# Altium PCB OpenPack_BATMOD_V2p0.PcbDoc (part 2 of 2)
Units mm, origin at the board's own origin, x right, y up, seen from the top; angles counter-clockwise.
Board outline 140 x 94 mm, 4 copper layers (Top Layer, Mid Layer 1, Mid Layer 2, Bottom Layer), stack 1.57 mm thick; 239 components, 147 nets, 762 pads, 455 vias.
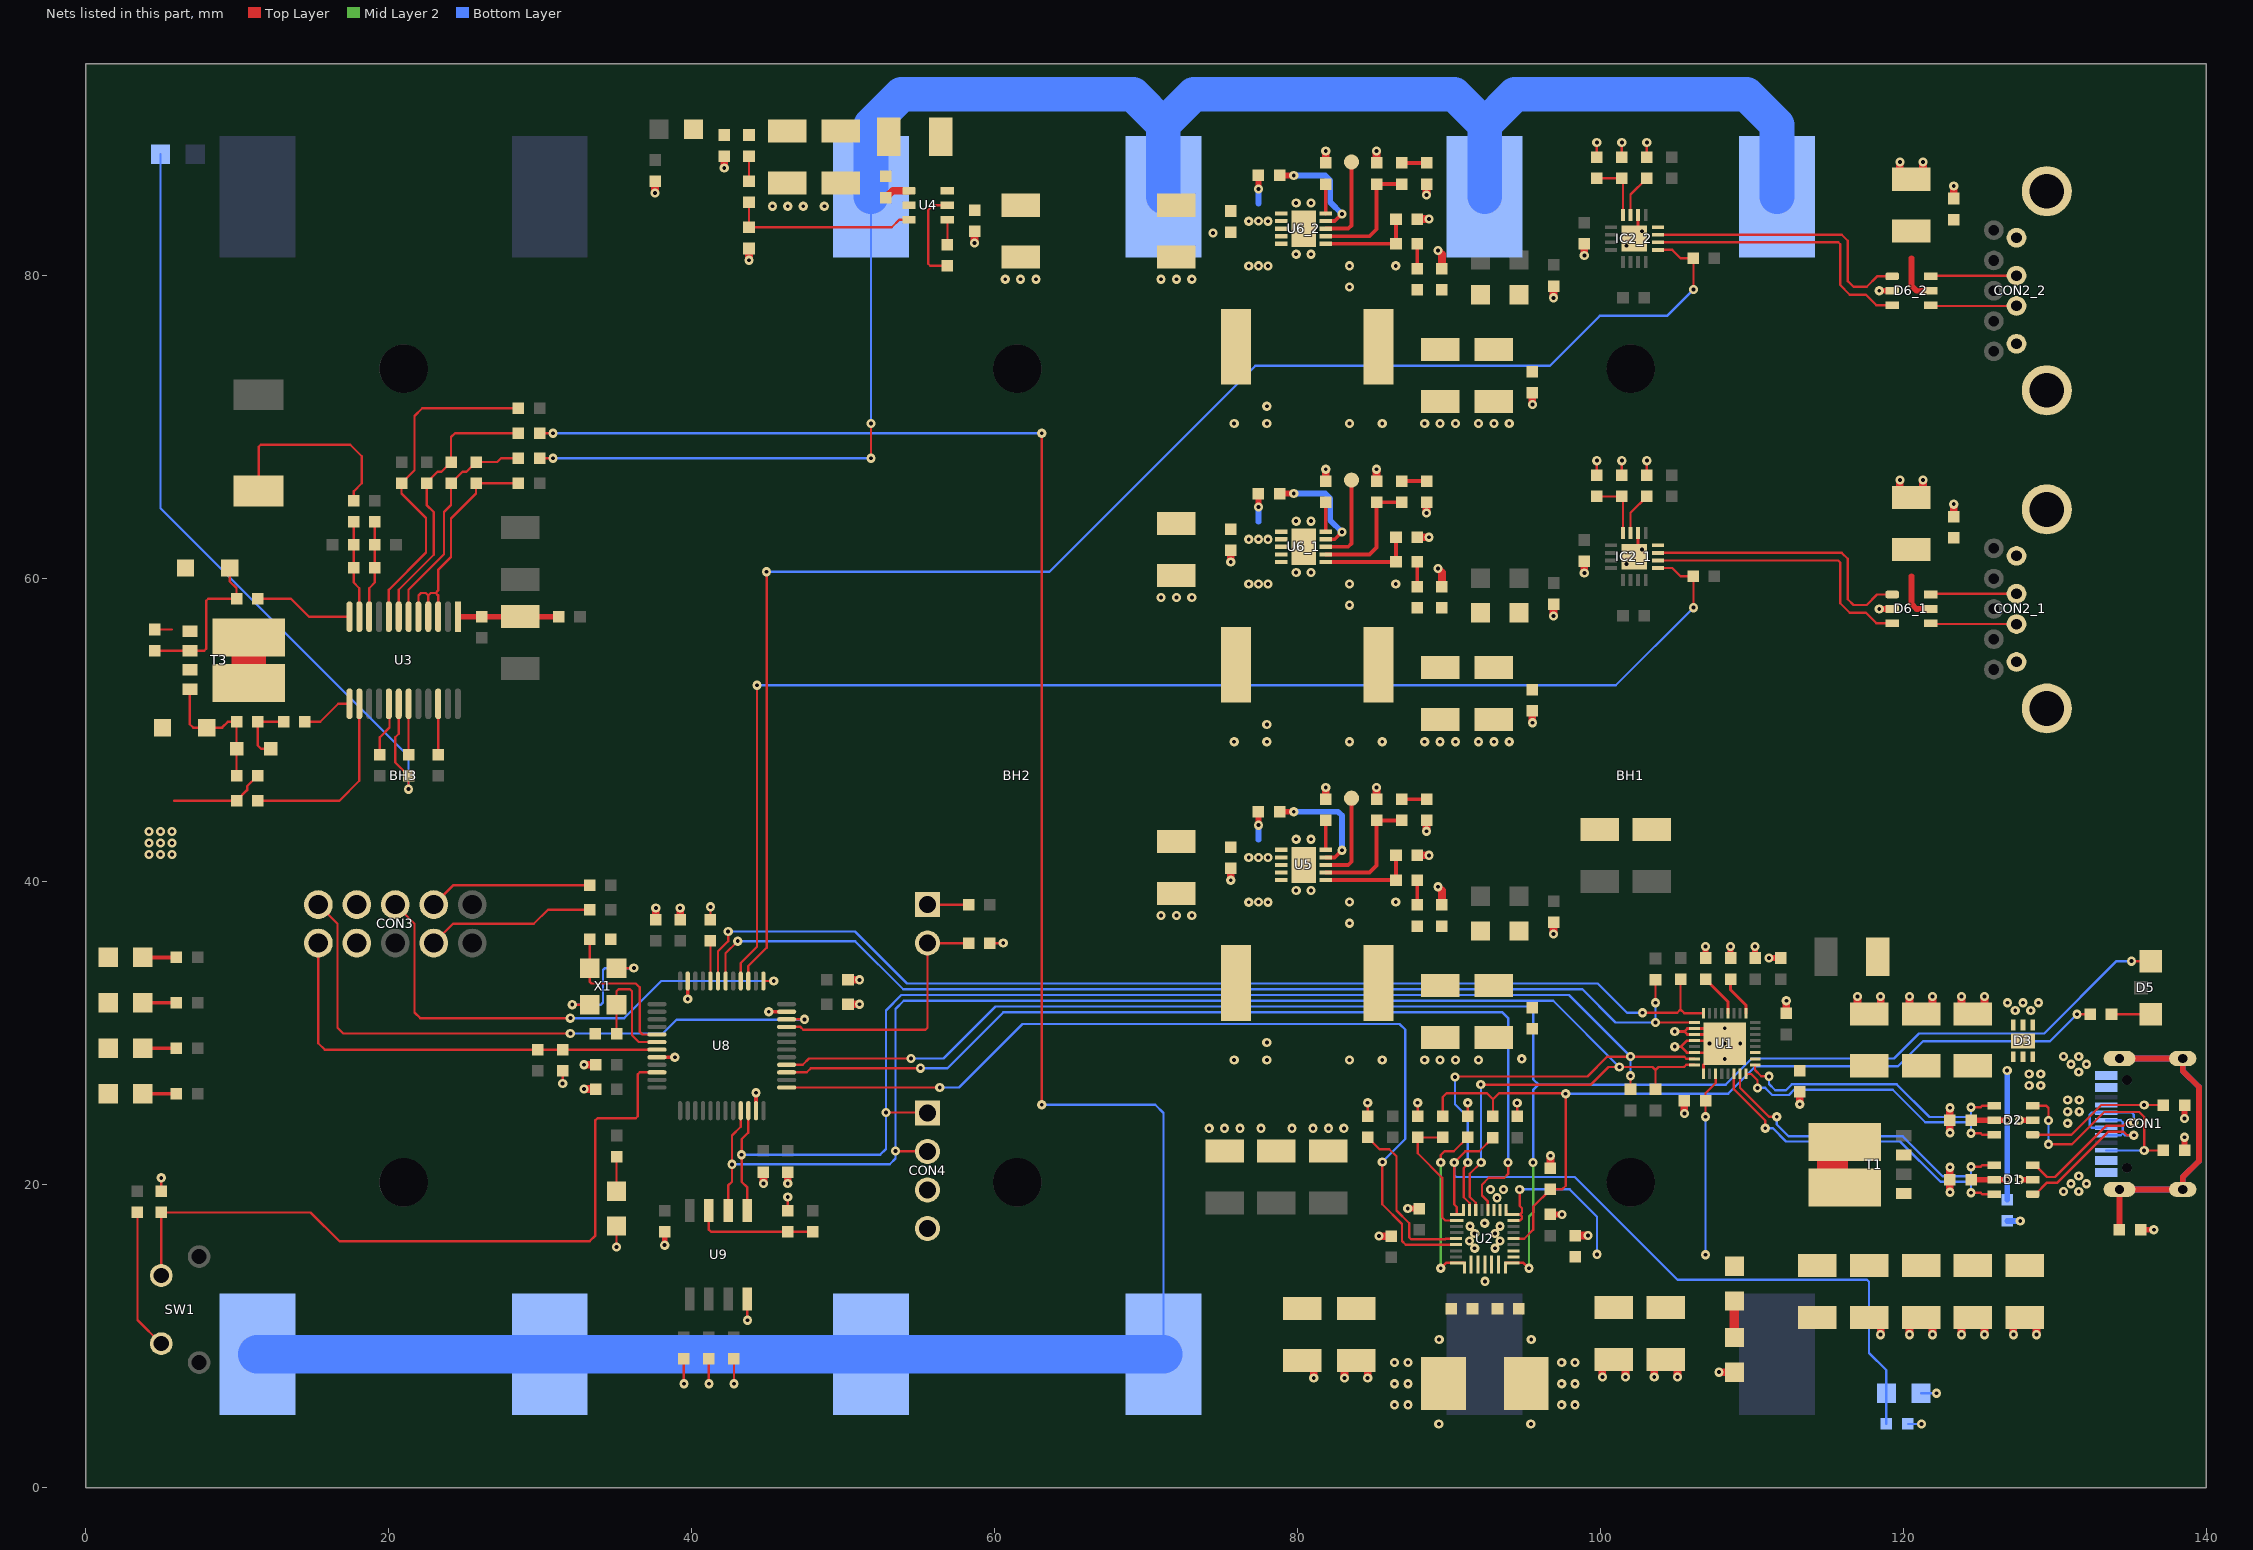
[diagram p4: the nets of this part, all layers, seen from the top]

## Via types
v1: diameter 0.61, hole 0.254, Top Layer to Bottom Layer, tented both sides, 455 vias

## Nets (pads, with @x,y where several pads share a name; then routed paths per layer and width w, separated by ;. In a path a pad name is that pad's centre, name@x,y a point inside that pad or via, vN(x,y) a via of type N, cw(c..) or ccw(c..) an arc to the next point about the centre after c; other vN are vias at no path point) (continued)
GND: C1.1 C2.1 C3.1 C4.1 C5.1 C6.1 C7.1 C8.1 C9.1 C10.1 C11.1 C12.1 C13.1 C14.1 C15.1 C16.1 C17.1 C18.1 C19.1 C20.1 C21.1 C22.1 C23.1 C24.1 C25_1.2 C25_2.2 C26.1 C28.1 C29.1 C30.1 C31.1 C33.1 C34.1 C35.1 C47.1 C48.2 C49.1 C50.1 C51.2 C52.2 C54.1 C55.2 C56.1 C57.1 C58.2 C59.2 C60.2 C61.2 C63_1.1 C63_2.1 C64_1.2 C64_2.2 C65_1.1 C65_2.1 C66_1.1 C66_2.1 C67_1.2 C67_2.2 C68_1.2 C68_2.2 C69_1.2 C69_2.2 C70_1.2 C70_2.2 C72_1.1 C72_2.1 C73_1.2 C73_2.2 C74.1 C75.1 C76.1 C77.1 C78.1 C79.1 C80.1 C81.1 C82.1 C83.1 C84.1 C85.1 C86.2 C87.1 C88_1.1 C88_2.1 C89.1 C90.1 C91.1 C92.1 CON1.A1/B12 CON1.A12/B1 CON2_1.4 CON2_1.Shell CON2_2.4 CON2_2.Shell CON3.3 CON3.4 CON4.3 CON4.4 D1.2 D2.2 D3.1 D3.2 D3.3 D3.7 D4.2 D6_1.2 D6_2.2 D8.1 D10.2 D11.2 D12.2 D13.2 IC2_1.14 IC2_1.17 IC2_2.14 IC2_2.17 R1.2 R7.2 R10.2 R11.2 R24.1 R25.1 R30.1 R33.1 R35.1 R36.2 R39_1.1 R39_2.1 R41_1.1 R41_2.1 R44_1.1 R44_2.1 R45_1.1 R45_2.1 R46_1.1 R46_2.1 R52.2 R59.1 R60.1 R61.1 R62.1 R63.1 R69.1 RT1.1 T3.3 U1.10 U1.11 U1.12 U1.14 U1.17 U1.33 U2.10 U2.11 U2.27 U4.2 U5.3 U5.4 U5.5 U5.EXP U6_1.3 U6_1.4 U6_1.5 U6_1.EXP U6_2.3 U6_2.4 U6_2.5 U6_2.EXP U8.8 U8.23 U8.35 U8.47 U9.4 | length 122.7
  Top Layer w0.152: R69.1@5,19.558 v1(5,20.447) ; 5.842,45.339 R25.1@9.969,45.339 10.668,46.037 10.668,46.291 R24.1@11.366,46.99 ; v1(31.496,26.67) C82.1@31.496,27.512 ; v1(35.052,15.875) D4.2@35.052,17.272 ; v1(39.497,6.858) R60.1@39.497,8.509 ; v1(41.148,6.858) R61.1@41.148,8.509 ; R52.2@41.25,37.49 v1(41.25,38.333) ; v1(42.799,6.858) R62.1@42.799,8.509 ; v1(43.688,11.049) U9.4@43.688,12.446 ; R59.1@46.355,18.288 v1(46.355,19.177) ; R63.1@59.69,35.941 v1(60.579,35.941) ; R7.2@84.63,24.511 v1(84.63,25.4) ; R10.2@87.932,24.511 v1(87.932,25.4) ; C33.1@91.234,24.511 v1(91.234,25.4) ; R36.2@94.5,24.499 v1(94.5,25.388) ; R44_1.1@99.758,66.82 v1(99.758,67.785) ; R44_2.1@99.758,87.82 v1(99.758,88.785) ; R45_1.1@101.409,66.82 v1(101.409,67.785) ; R45_2.1@101.409,87.82 v1(101.409,88.785) ; IC2_1.17@102.485,62.192 v1(102.747,61.93) ; IC2_2.17@102.485,83.192 v1(102.747,82.93) ; R46_1.1@103.06,66.82 v1(103.06,67.785) ; R46_2.1@103.06,87.82 v1(103.06,88.785)
  Top Layer w0.178: v1(104.902,30.105) 105.531,30.105 ; v1@104.964,29.167 v1(104.902,29.105) 105.305,29.105 ; U1.17@106.804,27.305 106.804,27.905 U1.33@107.604,28.705 ; U1.33@108.004,28.705 U1.33@107.604,28.705 ; U1.33@108.004,29.905 U1.11@106.204,29.905 105.731,29.905 105.531,30.105 ; U1.33@108.004,30.305 U1.10@106.204,30.305 105.731,30.305 105.531,30.105 ; 105.305,29.105 105.705,29.505 U1.12@106.204,29.505 108.004,29.505 v1(108.204,29.305) U1.33@107.604,28.705 ; 105.305,29.105 105.705,28.705 U1.14@106.204,28.705 U1.33@107.604,28.705
  Top Layer w0.203: IC2_1.17@102.485,62.192 IC2_1.14@102.485,62.998 ; IC2_2.17@102.485,83.192 IC2_2.14@102.485,83.998
  Top Layer w0.254: U8.8@37.721,28.409 v1(38.9,28.409) ; v1(39.75,32.259) U8.47@39.75,33.438 ; U8.23@44.25,24.88 v1(44.25,26.059) ; v1(45.1,31.409) U8.35@46.279,31.409
  Top Layer w0.381: v1(38.227,16.002) C89.1@38.227,16.891 ; C13.1@106.934,34.957 v1(106.934,35.719) ; C14.1@108.585,34.957 v1(108.585,35.719) ; C18.1@110.204,34.957 v1(110.204,35.719) ; v1(111.125,34.957) C17.1@111.887,34.957 ; v1(118.403,58) D6_1.2@119.253,58 ; v1(118.403,79) D6_2.2@119.253,79 ; v1(127.666,20.319) D1.2@128.524,20.319 ; v1(127.666,24.245) D2.2@128.524,24.245 ; R1.2@135.649,17.018 v1(136.525,17.018) ; C3.1@138.557,22.253 v1(138.557,23.129) ; v1(138.557,24.372) C4.1@138.557,25.248
  Top Layer w0.508: v1(32.907,26.304) C81.1@33.669,26.304 ; v1(32.907,27.909) C80.1@33.669,27.909 ; v1(37.592,85.454) C52.2@37.592,86.233 ; C79.1@37.645,37.49 v1(37.645,38.252) ; C78.1@39.25,37.49 v1(39.25,38.252) ; v1(42.164,87.105) C51.2@42.164,87.884 ; v1(43.795,81.009) R30.1@43.795,81.788 ; v1(44.75,20.066) C74.1@44.75,20.828 ; v1(46.355,20.066) C75.1@46.355,20.828 ; C76.1@50.331,31.909 v1(51.093,31.909) ; C77.1@50.331,33.514 v1(51.093,33.514) ; v1(58.686,82.152) C48.2@58.686,82.931 ; C64_2.2@75.578,82.855 C64_2.2@75.59,82.867 ; v1(75.59,40.089) C55.2@75.59,40.868 ; v1(75.59,61.089) C64_1.2@75.59,61.868 ; v1(81.074,7.239) C24.1@81.074,8.064 ; R33.1@81.868,45.44 v1(81.868,46.218) ; R39_1.1@81.868,66.44 v1(81.868,67.218) ; R39_2.1@81.868,87.439 v1(81.868,88.218) ; v1(83.106,7.239) C23.1@83.106,8.064 ; v1(84.63,7.239) C23.1@84.63,8.064 ; C61.2@85.217,45.44 v1(85.217,46.218) ; C70_1.2@85.217,66.44 v1(85.217,67.218) ; C70_2.2@85.217,87.439 v1(85.217,88.218) ; v1(85.375,16.599) C87.1@86.2,16.599 ; R35.1@87.9,41.734 v1(88.679,41.734) ; R41_1.1@87.9,62.734 v1(88.679,62.734) ; R41_2.1@87.9,83.734 v1(88.679,83.734) ; v1(88.519,43.327) C60.2@88.519,44.043 C60.2@88.519,44.106 ; v1(88.519,64.327) C69_1.2@88.519,65.043 C69_1.2@88.519,65.106 ; v1(88.519,85.327) C69_2.2@88.519,86.042 C69_2.2@88.519,86.106 ; v1(89.281,39.661) 89.535,39.407 C86.2@89.535,38.465 ; v1(89.281,60.661) 89.535,60.407 C25_1.2@89.535,59.465 ; v1(89.281,81.661) 89.535,81.407 C25_2.2@89.535,80.465 ; v1(95.504,50.484) C67_1.2@95.504,51.263 ; v1(95.504,71.484) C67_2.2@95.504,72.263 ; C31.1@96.695,21.082 v1(96.695,21.907) ; v1(96.901,36.533) C59.2@96.901,37.312 ; v1(96.901,57.533) C68_1.2@96.901,58.312 ; v1(96.901,78.533) C68_2.2@96.901,79.311 ; C19.1@98.346,16.637 v1(99.172,16.637) ; v1(98.933,60.372) C88_1.1@98.933,61.15 ; v1(98.933,81.327) C88_2.1@98.933,82.105 ; v1(100.124,7.302) C29.1@100.124,8.128 ; v1(101.648,7.302) C29.1@101.648,8.128 ; v1(103.553,7.302) C30.1@103.553,8.128 ; v1(105.077,7.302) C30.1@105.077,8.128 ; v1(105.537,24.701) C9.1@105.537,25.527 ; v1(107.823,7.62) C26.1@108.839,7.62 ; C15.1@112.268,31.305 v1(112.268,32.131) ; v1(113.157,25.305) C5.1@113.157,26.13 ; C6.1@116.967,31.591 v1(116.967,32.417) ; v1(118.491,10.096) C20.1@118.491,10.922 ; C6.1@118.491,31.591 v1(118.491,32.417) ; C72_1.1@119.761,65.678 v1(119.761,66.503) ; C72_2.1@119.761,86.677 v1(119.761,87.503) ; v1(120.396,10.096) C10.1@120.396,10.922 ; C7.1@120.396,31.591 v1(120.396,32.417) ; C72_1.1@121.285,65.678 v1(121.285,66.503) ; C72_2.1@121.285,86.677 v1(121.285,87.503) ; v1(121.92,10.096) C10.1@121.92,10.922 ; C7.1@121.92,31.591 v1(121.92,32.417) ; v1(123.063,19.493) C2.1@123.063,20.319 v1(123.063,21.144) ; v1(123.063,23.419) C1.1@123.063,24.245 v1(123.063,25.07) ; C73_1.2@123.317,64.09 v1(123.317,64.916) ; C73_2.2@123.317,85.09 v1(123.317,85.915) ; v1(123.825,10.096) C11.1@123.825,10.922 ; C8.1@123.825,31.591 v1(123.825,32.417) ; v1(125.349,10.096) C11.1@125.349,10.922 ; C8.1@125.349,31.591 v1(125.349,32.417) ; v1(127.254,10.096) C12.1@127.254,10.922 ; v1(128.778,10.096) C12.1@128.778,10.922
  Bottom Layer w0.152: R11.2@120.298,4.2 v1(121.187,4.2) ; RT1.1@121.158,6.223 v1(122.174,6.223)
  Bottom Layer w0.381: C85.1@126.842,17.602 v1(127.711,17.602)
  other v1: 89.329,4.191 95.403,4.191 89.351,9.779 95.425,9.779 92.377,13.614 92.354,17.45 93.167,19.126 130.556,19.552 131.572,19.552 92.734,19.685 93.601,19.685 131.064,20.06 132.08,20.06 131.572,20.568 74.168,23.712 75.184,23.712 76.2,23.712 77.597,23.712 79.629,23.712 81.026,23.712 82.042,23.712 83.058,23.712 131.572,27.432 131.064,27.94 132.08,27.94 75.819,28.231 77.978,28.231 83.439,28.231 85.598,28.231 88.392,28.231 89.408,28.231 90.424,28.231 91.948,28.231 94.8,28.3 108.204,28.289 130.556,28.448 131.572,28.448 107.188,29.305 109.22,29.305 77.978,29.374 108.204,30.321 127.381,31.496 128.397,31.496 126.873,32.004 127.889,32.004 128.905,32.004 83.439,37.248 70.993,37.756 72.009,37.756 73.025,37.756 83.439,38.645 86.487,38.645 79.912,39.407 80.899,39.407 4.191,41.783 4.953,41.783 5.715,41.783 4.191,42.545 4.953,42.545 5.715,42.545 79.912,42.792 80.899,42.792 4.191,43.307 4.953,43.307 5.715,43.307 75.819,49.231 77.978,49.231 83.439,49.231 85.598,49.231 88.392,49.231 89.408,49.231 90.424,49.231 91.948,49.231 92.964,49.231 93.98,49.231 77.978,50.374 83.439,58.248 70.993,58.756 72.009,58.756 73.025,58.756 83.439,59.645 86.487,59.645 79.912,60.407 80.899,60.407 101.723,60.966 79.912,63.792 80.899,63.792 75.819,70.231 77.978,70.231 83.439,70.231 85.598,70.231 88.392,70.231 89.408,70.231 90.424,70.231 91.948,70.231 92.964,70.231 93.98,70.231 77.978,71.374 83.439,79.248 60.706,79.756 61.722,79.756 62.738,79.756 70.993,79.756 72.009,79.756 73.025,79.756 83.439,80.645 86.487,80.645 79.912,81.407 80.899,81.407 101.723,81.966 74.422,82.804 45.339,84.582 46.355,84.582 47.371,84.582 48.768,84.582 79.912,84.792 80.899,84.792
I2C_C_SCL: CON4.2 R2.1 U1.16 U2.14 U8.21 U9.6 | length 104.5
  Top Layer w0.152: U9.6@42.418,18.288 42.418,19.939 42.672,20.193 v1(42.672,21.336) 42.672,23.241 43.25,23.819 U8.21@43.25,24.88 ; v1(53.467,22.225) 53.486,22.206 55.561,22.206 CON4.2@55.579,22.188 ; U2.14@91.766,18.332 91.766,18.798 91.374,19.19 91.374,20.714 v1(92.123,21.463) ; v1(92.1,26.6) 99.371,26.6 100.533,27.762 v1(101.244,27.762) 103.429,27.762 103.632,27.559 ; R2.1@103.632,26.289 103.632,27.559 ; U1.16@106.204,27.905 105.656,27.905 105.513,27.762 103.835,27.762 103.632,27.559
  Bottom Layer w0.152: v1(42.672,21.336) 53.086,21.336 53.467,21.717 53.467,31.592 54.006,32.131 96.875,32.131 v1(101.244,27.762) ; v1(92.1,26.6) 92.111,26.589 92.111,21.475 v1(92.123,21.463)
I2C_C_SDA: CON4.1 R3.1 U1.15 U2.15 U8.22 U9.5 | length 107.9
  Top Layer w0.152: U9.5@43.688,18.288 43.688,19.812 43.307,20.193 v1(43.307,21.971) 43.307,22.987 43.75,23.43 U8.22@43.75,24.88 ; v1(52.832,24.765) 55.542,24.765 CON4.1@55.579,24.728 ; v1(90.4,27.1) 90.433,27.133 99.133,27.133 100.448,28.448 v1(101.981,28.448) 105.513,28.448 105.656,28.305 U1.15@106.204,28.305 ; v1(91.234,21.463) 91.234,21.358 90.974,21.098 90.974,19.159 91.366,18.767 U2.15@91.366,18.332 ; R3.1@101.981,26.289 v1(101.981,27.178)
  Bottom Layer w0.152: v1@43.163,21.971 52.451,21.971 52.832,22.352 v1(52.832,24.765) 52.832,31.496 53.848,32.512 97.917,32.512 v1(101.981,28.448) v1(101.981,27.178) ; v1(90.4,27.1) 90.4,25.3 91.234,24.466 v1(91.234,21.463)
I2C_T_SCL: R4.1 U1.9 U8.42 | length 71.2
  Top Layer w0.152: U8.42@42.25,33.438 42.25,35.265 v1(43.053,36.068) ; v1@103.601,30.732 v1@103.63,30.703 ; v1(103.632,30.705) U1.9@106.204,30.705 ; v1(103.632,32.004) R4.1@103.632,33.528
  Bottom Layer w0.152: v1(43.053,36.068) 50.8,36.068 53.975,32.893 57.099,32.893 98.806,32.893 100.994,30.705 v1(103.632,30.705) ; v1@103.632,30.734 v1(103.632,32.004)
I2C_T_SDA: R5.1 U1.8 U8.43 | length 72.3
  Top Layer w0.152: U8.43@41.75,33.438 41.75,35.4 42.418,36.068 v1(42.418,36.703) ; v1(102.768,31.344) 105.068,31.344 105.283,31.559 ; R5.1@105.283,33.56 105.283,31.559 ; U1.8@106.804,31.305 105.537,31.305 105.283,31.559
  Bottom Layer w0.152: v1(42.418,36.703) 50.8,36.703 54.229,33.274 57.099,33.274 99.822,33.274 101.752,31.344 v1(102.768,31.344)
I\N\T\: U2.21 U8.25 | length 61.5
  Top Layer w0.152: U8.25@46.279,26.409 v1(56.381,26.409) ; v1(85.6,21.5) 85.6,18.708 86.9,17.408 86.9,16.284 87.152,16.032 U2.21@90.466,16.032
  Bottom Layer w0.152: v1(56.381,26.409) 57.651,26.409 61.849,30.607 86.741,30.607 87.122,30.226 87.122,23.022 v1(85.6,21.5)
ILIM_HIZ: R8.2 R10.1 U2.17 | length 8.6
  Top Layer w0.152: R8.2@89.583,23.114 R10.1@87.932,23.114 87.932,22.068 89.558,20.442 89.558,17.831 89.756,17.632 U2.17@90.516,17.632
LDO_1V5: C13.2 U1.4 | length 2.9
  Top Layer w0.203: C13.2@106.934,33.56 108.404,32.09 U1.4@108.404,31.305
LDO_3V3: C14.2 U1.1 | length 2.7
  Top Layer w0.203: C14.2@108.585,33.56 108.585,32.861 109.604,31.842 U1.1@109.604,31.305
NetBH1_1: BH1.1 BH1.3 BH2.2 BH2.4 R17.1 | length 123
  Top Layer w0.152: R17.1@29.972,67.945 v1(30.861,67.945) ; v1(51.85,67.945) v1(51.85,70.241)
  Bottom Layer w0.152: v1(30.861,67.945) v1(51.85,67.945) ; v1(51.85,70.241) BH2.4@51.85,85.2
  Bottom Layer w2.286: BH2.4@51.85,85.2 51.85,89.959 53.859,91.968 69.141,91.968 71.15,89.959 ; BH2.2@71.15,85.2 71.15,89.959 ; BH1.1@92.35,85.2 92.35,89.959 ; BH1.3@111.65,85.2 111.65,89.959 109.641,91.968 94.359,91.968 92.35,89.959 ; 71.15,89.959 73.159,91.968 90.341,91.968 92.35,89.959
NetBH2_1: BH2.1 BH2.3 BH3.2 BH3.4 R19.1 | length 161.5
  Top Layer w0.152: R19.1@29.972,69.596 v1(30.861,69.596) ; v1(63.119,25.273) v1(63.119,69.596)
  Bottom Layer w0.152: v1(30.861,69.596) v1(63.119,69.596) ; v1(63.119,25.273) 70.612,25.273 71.15,24.735 71.15,10.3 BH2.1@71.15,8.8
  Bottom Layer w2.54: BH3.2@11.35,8.8 BH3.4@30.65,8.8 BH2.1@71.15,8.8
NetC3_2: C3.2 CON1.B5 D2.3 | length 16.8
  Top Layer w0.152: D2.3@128.524,25.195 129.431,25.195 129.565,25.061 v1(129.565,24.232) ; v1(129.565,22.657) 131.115,22.657 133.248,24.79 135.56,24.79 135.885,24.466 v1(135.885,22.253) C3.2@137.16,22.253
  Bottom Layer w0.152: v1(129.565,22.657) v1(129.565,24.232) ; CON1.B5@133.382,22.253 v1(135.885,22.253)
NetC4_2: C4.2 CON1.A5 D2.1 | length 12
  Top Layer w0.152: D2.1@128.524,23.295 131.093,23.295 133.051,25.253 v1(135.885,25.253) 137.155,25.253 C4.2@137.16,25.248
  Bottom Layer w0.152: CON1.A5@133.382,25.253 v1(135.885,25.253)
NetC26_2: C26.2 R6.1 | length 2.4
  Top Layer w0.635: C26.2@108.839,9.906 R6.1@108.839,12.319
NetC38_1: C38.1 C45.2 R58.2 U3.11 | length 6.4
  Top Layer w0.152: R58.2@17.701,63.754 C45.2@17.701,62.23 C38.1@17.701,60.706 17.701,59.738 18.075,59.365 U3.11@18.075,57.485
NetC38_2: C38.2 C44.2 R57.2 U3.10 | length 6.4
  Top Layer w0.152: U3.10@18.725,57.485 18.725,59.365 19.098,59.738 C38.2@19.098,60.706 C44.2@19.098,62.23 R57.2@19.098,63.754
NetC46_1: C46.1 L2.1 U4.6
NetC46_2: C46.2 U4.1 | length 1.7
  Top Layer w0.508: C46.2@52.832,85.153 53.274,85.595 U4.1@54.356,85.595
NetC49_2: C49.2 C50.2 C51.1 L2.2 L3.1 R28.2
NetC53_1: C53.1 L5.1 U5.2 | length 1.9
  Top Layer w0.381: v1(77.419,43.725) C53.1@77.419,44.614
  Bottom Layer w0.381: 77.419,42.76 v1(77.419,43.725)
  other v1: 76.784,38.637 77.419,38.645 78.054,38.637 76.784,41.591 78.054,41.591 77.419,41.599
NetC53_2: C53.2 U5.9 | length 7.8
  Top Layer w0.254: U5.9@81.868,41.599 82.456,41.599 v1(82.931,42.074)
  Top Layer w0.381: C53.2@78.816,44.614 v1(79.756,44.614)
  Bottom Layer w0.381: v1(79.756,44.614) 82.677,44.614 82.931,44.36 v1(82.931,42.074)
NetC60_1: C60.1 R34.1 | length 1.7
  Top Layer w0.254: R34.1@86.868,45.44 C60.1@88.519,45.44
NetC61_1: C61.1 R34.2 U5.7 | length 8.2
  Top Layer w0.254: U5.7@81.868,40.599 84.758,40.599 85.217,41.058 C61.1@85.217,44.043 R34.2@86.868,44.043
NetC62_1_1: C62_1.1 L7_1.1 U6_1.2 | length 1.9
  Top Layer w0.381: v1(77.419,64.725) C62_1.1@77.419,65.614
  Bottom Layer w0.381: 77.419,63.76 v1(77.419,64.725)
  other v1: 76.784,59.637 77.419,59.645 78.054,59.637 76.784,62.591 78.054,62.591 77.419,62.599
NetC62_1_2: C62_1.2 U6_1.9 | length 7.3
  Top Layer w0.254: U6_1.9@81.868,62.599 82.456,62.599 v1(82.931,63.074)
  Top Layer w0.381: C62_1.2@78.816,65.614 v1(79.756,65.614)
  Bottom Layer w0.381: v1(79.756,65.614) 81.834,65.614 82.169,65.279 82.169,63.836 v1(82.931,63.074)
NetC62_2_1: C62_2.1 L7_2.1 U6_2.2 | length 1.9
  Top Layer w0.381: v1(77.419,85.725) C62_2.1@77.419,86.614
  Bottom Layer w0.381: 77.419,84.76 v1(77.419,85.725)
  other v1: 76.784,80.637 77.419,80.645 78.054,80.637 76.784,83.591 77.419,83.599 78.054,83.591
NetC62_2_2: C62_2.2 U6_2.9 | length 7.3
  Top Layer w0.254: U6_2.9@81.868,83.599 82.456,83.599 v1(82.931,84.074)
  Top Layer w0.381: C62_2.2@78.816,86.614 v1(79.756,86.614)
  Bottom Layer w0.381: v1(79.756,86.614) 81.834,86.614 82.169,86.279 82.169,84.836 v1(82.931,84.074)
NetC69_1_1: C69_1.1 R40_1.1 | length 1.7
  Top Layer w0.254: R40_1.1@86.868,66.44 C69_1.1@88.519,66.44
NetC69_2_1: C69_2.1 R40_2.1 | length 1.7
  Top Layer w0.254: R40_2.1@86.868,87.439 C69_2.1@88.519,87.439
NetC70_1_1: C70_1.1 R40_1.2 U6_1.7 | length 8.2
  Top Layer w0.254: U6_1.7@81.868,61.599 84.758,61.599 85.217,62.058 C70_1.1@85.217,65.043 R40_1.2@86.868,65.043
NetC70_2_1: C70_2.1 R40_2.2 U6_2.7 | length 8.2
  Top Layer w0.254: U6_2.7@81.868,82.599 84.758,82.599 85.217,83.058 C70_2.1@85.217,86.042 R40_2.2@86.868,86.042
NetC83_2: C83.2 U8.5 X1.1 | length 10.4
  Top Layer w0.152: C83.2@33.274,36.195 X1.1@33.274,34.29 33.274,33.408 33.408,33.274 36.322,33.274 36.576,33.02 36.576,30.106 36.773,29.909 U8.5@37.721,29.909
NetC84_2: C84.2 U8.6 X1.3 | length 8.7
  Top Layer w0.152: C84.2@35.052,29.972 X1.3@35.052,31.877 35.052,32.759 35.186,32.893 35.934,32.893 36.068,32.759 36.068,29.852 36.511,29.409 U8.6@37.721,29.409
NetCON1_A6: CON1.A6 CON1.B6 D1.1 | length 12.3
  Top Layer w0.152: D1.1@128.524,19.369 128.714,19.369 129.476,20.13 130.164,20.13 133.532,23.499 134.502,23.499 134.747,23.253 v1(135.204,23.253)
  Bottom Layer w0.152: CON1.B6@133.382,23.253 134.334,23.253 134.468,23.387 ; CON1.A6@133.382,24.253 134.334,24.253 134.468,24.119 134.468,23.757 ; 134.468,23.749 134.468,23.387 ; v1(135.204,23.253) 134.602,23.253 134.468,23.387
NetCON1_A7: CON1.A7 CON1.B7 D1.3 | length 13.9
  Top Layer w0.152: D1.3@128.524,21.269 128.714,21.269 129.476,20.508 130.007,20.508 133.375,23.876 134.502,23.876 134.73,24.105 v1(135.204,24.105)
  Bottom Layer w0.152: 132.296,24.249 132.296,23.887 132.43,23.753 CON1.A7@133.382,23.753 ; 132.296,24.257 132.296,24.619 132.43,24.753 CON1.B7@133.382,24.753 135.07,24.753 135.204,24.619 v1(135.204,24.105)
NetCON1_Shell: CON1.Shell R1.1 | length 38.3
  Top Layer w0.381: R1.1@134.252,17.018 CON1.Shell@134.252,19.683 CON1.Shell@138.432,19.683 138.432,20.5 139.497,21.565 ; CON1.Shell@134.252,28.323 CON1.Shell@138.432,28.323 138.432,27.506 139.497,26.441 139.497,21.641
  Bottom Layer w0.381: CON1.Shell@134.252,19.683 CON1.Shell@138.432,19.683 138.432,20.5 139.497,21.565 ; CON1.Shell@134.252,28.323 CON1.Shell@138.432,28.323 138.432,27.506 139.497,26.441 139.497,21.641
NetCON3_7: CON3.7 R50.2 | length 11.2
  Top Layer w0.152: CON3.7@22.987,35.941 24.257,37.211 29.591,37.211 30.527,38.147 R50.2@33.274,38.147
NetCON3_8: CON3.8 R51.1 | length 10.8
  Top Layer w0.152: CON3.8@22.987,38.481 24.257,39.751 R51.1@33.274,39.751
NetCON5_1: CON5.1 R56.1 | length 2.7
  Top Layer w0.152: CON5.1@55.579,38.481 R56.1@58.293,38.481
NetD4_1: D4.1 R54.2 | length 2.3
  Top Layer w0.152: D4.1@35.052,19.558 R54.2@35.052,21.844
NetD5_A: D5.A R55.2 | length 2.6
  Top Layer w0.152: R55.2@133.731,31.242 136.317,31.242 D5.A@136.325,31.25
NetD7_1: D7.1 R22.1 R42.2 | length 4.2
  Top Layer w0.152: D7.1@12.22,48.768 11.59,48.768 11.366,48.991 R42.2@11.366,50.546 R22.1@13.081,50.546
NetD7_2: D7.2 D8.2 R24.2 R42.1 T3.4 | length 9.2
  Top Layer w0.152: T3.4@6.888,52.705 6.888,50.388 7.111,50.165 D8.2@8.001,50.165 9.017,50.165 9.398,50.546 R42.1@9.969,50.546 R24.2@9.969,46.99
NetD9_1: D9.1 R23.1 R26.2 R58.1 T3.1 | length 14.4
  Top Layer w0.152: R23.1@4.572,56.642 5.715,56.642 ; R26.2@11.43,65.786 11.43,68.7 11.564,68.834 17.476,68.834 18.237,68.073 18.237,66.294 17.701,65.758 R58.1@17.701,65.151
NetD9_2: D9.2 R21.1 R23.2 T3.2 | length 10.9
  Top Layer w0.152: R23.2@4.572,55.245 T3.2@6.888,55.245 7.842,55.245 7.976,55.379 7.976,58.54 8.11,58.674 R21.1@9.969,58.674 9.969,59.372 9.525,59.817 D9.2@9.525,60.706
NetD10_1: D10.1 R65.2 | length 2.2
  Top Layer w0.254: D10.1@3.786,26 R65.2@6,26
NetD11_1: D11.1 R66.2 | length 2.2
  Top Layer w0.254: D11.1@3.786,29 R66.2@6,29
NetD12_1: D12.1 R67.2 | length 2.2
  Top Layer w0.254: D12.1@3.786,32 R67.2@6,32
NetD13_1: D13.1 R68.2 | length 2.2
  Top Layer w0.254: D13.1@3.786,35 R68.2@6,35
NetIC2_1_15: IC2_1.15 R46_1.2 | length 2.9
  Top Layer w0.152: IC2_1.15@101.985,62.998 101.985,64.347 R46_1.2@103.06,65.423
NetIC2_1_16: IC2_1.16 R44_1.2 R45_1.2 | length 4.1
  Top Layer w0.152: R44_1.2@99.758,65.423 R45_1.2@101.409,65.423 101.485,65.347 IC2_1.16@101.485,62.998
NetIC2_2_15: IC2_2.15 R46_2.2 | length 2.9
  Top Layer w0.152: IC2_2.15@101.985,83.998 101.985,85.347 R46_2.2@103.06,86.423
NetIC2_2_16: IC2_2.16 R44_2.2 R45_2.2 | length 4.1
  Top Layer w0.152: R44_2.2@99.758,86.423 R45_2.2@101.409,86.423 101.485,86.347 IC2_2.16@101.485,83.998
NetR15_2: R15.2 U3.22 | length 3.3
  Top Layer w0.152: R15.2@23.275,48.387 U3.22@23.275,51.735
NetR16_1: R16.1 RT2.2 U3.18 | length 54.8
  Top Layer w0.152: U3.18@20.675,51.735 20.675,49.758 20.447,49.53 20.447,47.868 R16.1@21.325,46.99 v1(21.325,46.101)
  Bottom Layer w0.152: RT2.2@4.953,88.011 4.953,64.643 21.325,48.271 v1(21.325,46.101)
NetR16_2: R16.2 U3.19 | length 3.3
  Top Layer w0.152: R16.2@21.325,48.387 U3.19@21.325,51.735
NetR18_2: R18.2 U3.17 | length 3.9
  Top Layer w0.152: R18.2@19.431,48.387 19.431,49.53 20.066,50.165 U3.17@20.066,52.07
NetR21_2: R21.2 U3.12 | length 6.6
  Top Layer w0.152: R21.2@11.366,58.674 13.564,58.674 14.752,57.485 U3.12@17.425,57.485
NetR22_2: R22.2 U3.13 | length 3.4
  Top Layer w0.152: R22.2@14.478,50.546 15.494,50.546 16.683,51.735 U3.13@17.425,51.735
NetR25_2: R25.2 U3.14 | length 12.3
  Top Layer w0.152: R25.2@11.366,45.339 16.764,45.339 18.075,46.65 U3.14@18.075,51.735
NetR27_1: R27.1 U4.4 | length 1.7
  Top Layer w0.152: R27.1@56.896,82.042 U4.4@56.896,83.695
NetR28_1: R28.1 R29.2 | length 1.7
  Top Layer w0.152: R29.2@43.795,86.233 R28.1@43.795,87.884
NetR31_1: R31.1 R32.2 | length 1.6
  Top Layer w0.254: R31.1@87.9,38.465 R32.2@87.9,40.099
NetR33_2: R33.2 U5.10 | length 1.9
  Top Layer w0.254: U5.10@81.868,42.099 R33.2@81.868,44.043
NetR37_1_1: R37_1.1 R38_1.2 | length 1.6
  Top Layer w0.254: R37_1.1@87.9,59.465 R38_1.2@87.9,61.099
NetR37_2_1: R37_2.1 R38_2.2 | length 1.6
  Top Layer w0.254: R37_2.1@87.9,80.465 R38_2.2@87.9,82.099
NetR39_1_2: R39_1.2 U6_1.10 | length 1.9
  Top Layer w0.254: U6_1.10@81.868,63.099 R39_1.2@81.868,65.043
NetR39_2_2: R39_2.2 U6_2.10 | length 1.9
  Top Layer w0.254: U6_2.10@81.868,84.099 R39_2.2@81.868,86.042
NetR52_1: R52.1 U8.44 | length 2.7
  Top Layer w0.152: U8.44@41.25,33.438 R52.1@41.25,36.093
NetR64_1: R64.1 SW1.2 | length 9.3
  Top Layer w0.152: R64.1@3.429,18.161 3.429,11.071 SW1.2@5,9.5
NetT1_9: T1.9 T1.10 | length 3
  Top Layer w2.032: T1.9@115.316,19.971 T1.10@115.316,22.971
NetT3_9: T3.9 T3.10 | length 3
  Top Layer w2.286: T3.10@10.783,53.11 T3.9@10.783,56.11
NetTP1_0: TP1.0 U5.8 | length 6
  Top Layer w0.254: U5.8@81.868,41.099 83.353,41.099 83.566,41.312 TP1.0@83.566,45.503
NetTP2_1_0: TP2_1.0 U6_1.8 | length 6
  Top Layer w0.254: U6_1.8@81.868,62.099 83.353,62.099 83.566,62.312 TP2_1.0@83.566,66.503
NetTP2_2_0: TP2_2.0 U6_2.8 | length 6
  Top Layer w0.254: U6_2.8@81.868,83.099 83.353,83.099 83.566,83.312 TP2_2.0@83.566,87.503
NetX1_2: X1.2 X1.4 | length 8.6
  Top Layer w0.152: v1(32.131,31.877) X1.2@33.274,31.877 ; X1.4@35.052,34.29 v1(36.195,34.29)
  Bottom Layer w0.152: v1(32.131,31.877) 34.029,31.877 34.163,32.011 34.163,34.156 34.297,34.29 v1(36.195,34.29)
PMID: C28.2 C29.2 C30.2 U2.29
PROG: R7.1 U2.20 | length 11.2
  Top Layer w0.152: R7.1@84.63,23 84.744,23 85.407,22.337 86.063,22.337 86.535,21.865 86.535,18.288 87.373,17.45 87.373,16.517 87.507,16.383 89.735,16.383 89.784,16.432 U2.20@90.466,16.432
Q\O\N\: U2.12 U8.27 | length 63.6
  Top Layer w0.152: U8.27@46.279,27.409 47.602,27.409 47.879,27.686 v1(55.118,27.686) ; U2.12@92.566,18.332 92.566,18.889 92.174,19.281 92.174,19.99 92.631,20.447 93.647,20.447 93.901,20.701 v1(93.901,21.463)
  Bottom Layer w0.152: v1(55.118,27.686) 56.896,27.686 60.579,31.369 93.531,31.369 93.901,30.999 v1(93.901,21.463)
REGN: C31.2 R8.1 R9.1 R55.1 U2.5 | length 59.6
  Top Layer w0.152: R8.1@89.583,24.511 89.583,25.783 89.835,26.035 92.5,26.035 92.9,25.635 ; R9.1@92.9,24.499 92.9,25.635 ; U2.5@94.266,16.432 94.966,16.432 95.552,17.018 95.552,18.542 C31.2@96.695,19.685 97.457,19.685 97.7,19.928 v1(97.7,26) 97.665,26.035 93.3,26.035 92.9,25.635 ; v1(131.445,31.242) R55.1@132.334,31.242
  Bottom Layer w0.152: v1(97.7,26) 108.423,26 110.236,27.813 119.634,27.813 121.285,29.464 129.667,29.464 v1(131.445,31.242)
RST: C82.2 CON3.1 R53.1 U8.7 | length 29.1
  Top Layer w0.152: CON3.1@15.367,35.941 15.367,29.337 15.795,28.909 R53.1@29.845,28.909 C82.2@31.496,28.909 U8.7@37.721,28.909
S\T\A\T\_1: IC2_1.9 R47_1.1 U8.40 | length 88.5
  Top Layer w0.152: U8.40@43.25,33.438 43.25,34.631 44.323,35.704 v1(44.323,52.959) ; IC2_1.9@103.785,60.698 104.738,60.698 105.283,60.153 R47_1.1@106.108,60.153 106.134,60.128 v1(106.134,58.083)
  Bottom Layer w0.152: v1(44.323,52.959) 44.831,52.959 101.01,52.959 v1(106.134,58.083)
S\T\A\T\_2: IC2_2.9 R47_2.1 U8.39 | length 101
  Top Layer w0.152: U8.39@43.75,33.438 43.75,34.424 44.958,35.632 v1(44.958,60.452) ; IC2_2.9@103.785,81.698 104.738,81.698 105.283,81.153 R47_2.1@106.108,81.153 106.134,81.128 v1(106.134,79.083)
  Bottom Layer w0.152: v1(44.958,60.452) 63.627,60.452 77.216,74.041 96.647,74.041 99.949,77.343 104.394,77.343 v1(106.134,79.083)
SDRV: C33.2 U2.24 | length 11.7
  Top Layer w0.152: v1(89.456,14.478) 89.81,14.832 U2.24@90.541,14.832 90.992,14.832 91.016,14.808 U2.24@91.016,14.582 ; v1(89.456,21.463) 89.5,21.507 89.456,21.551 89.456,21.956 89.7,22.2 90.32,22.2 C33.2@91.234,23.114
  Mid Layer 2 w0.152: v1(89.456,14.478) v1(89.456,21.463)
STAT: D5.K U2.1 U8.28 | length 114.1
  Top Layer w0.152: U8.28@46.279,27.909 47.34,27.909 47.752,28.321 v1(54.483,28.321) ; U2.1@93.716,14.582 93.716,14.784 93.74,14.808 93.74,14.832 U2.1@94.191,14.832 94.922,14.832 v1(95.276,14.478) ; v1(135.049,34.75) D5.K@136.325,34.75
  Mid Layer 2 w0.152: v1(95.276,14.478) 95.287,14.489 95.287,17.896 95.552,18.161 v1(95.552,21.463)
  Bottom Layer w0.152: v1(54.483,28.321) 56.642,28.321 60.071,31.75 60.452,31.75 95.3,31.75 95.552,31.498 95.552,26.948 95.9,26.6 ; v1(95.552,21.463) 95.552,26.252 95.9,26.6 ; v1(135.049,34.75) 134.064,34.75 129.286,29.972 121.031,29.972 119.38,28.321 109.982,28.321 108.261,26.6 95.9,26.6
STAY: CON5.2 R63.2 U8.33 | length 17.7
  Top Layer w0.152: U8.33@46.279,30.409 47.188,30.409 47.371,30.226 55.445,30.226 55.579,30.36 CON5.2@55.579,35.941 R63.2@58.293,35.941
SW1: C27.1 L1.1 U2.28 | length 0.8
  Top Layer w0.381: C27.1@96.695,18.034 v1(97.457,18.034)
  other v1: 97.435,5.461 98.324,5.461 97.435,6.858 98.324,6.858 97.435,8.255 98.324,8.255 93.04,15.799 93.371,16.281 93.04,16.764 93.371,17.247
SW2: C32.2 L1.2 U2.26 | length 0.8
  Top Layer w0.381: v1(87.275,18.415) C32.2@88.037,18.415
  other v1: 86.408,5.461 87.297,5.461 86.408,6.858 87.297,6.858 86.408,8.255 87.297,8.255 91.694,15.799 91.361,16.281 91.694,16.764 91.389,17.247
SWCLK: CON3.6 U8.37 | length 33.2
  Top Layer w0.152: CON3.6@20.447,38.481 21.717,37.211 21.717,31.369 22.098,30.988 v1(32.004,30.988) ; U8.37@44.75,33.438 v1(45.429,33.438)
  Bottom Layer w0.152: v1(32.004,30.988) 35.56,30.988 38.01,33.438 v1(45.429,33.438)
SWDIO: CON3.2 U8.34 | length 41.2
  Top Layer w0.152: CON3.2@15.367,38.481 16.637,37.211 16.637,30.353 17.018,29.972 v1(32.004,29.972) ; U8.34@46.279,30.909 v1(47.458,30.909)
  Bottom Layer w0.152: v1(32.004,29.972) 38.1,29.972 39.004,30.876 47.425,30.876 v1(47.458,30.909)
TS: R9.2 R11.1 RT1.2 U2.16 | length 48.4
  Top Layer w0.152: U2.16@90.513,18.032 90.513,18.526 90.345,18.694 v1(90.345,21.463) 91.082,22.2 91.998,22.2 R9.2@92.9,23.102 ; U2.16@90.942,18.032 90.966,18.056 U2.16@90.966,18.282
  Top Layer w0.203: U2.16@90.513,18.032 U2.16@90.942,18.032
  Bottom Layer w0.152: v1(90.345,21.463) 90.345,20.634 90.479,20.5 98.3,20.5 105.084,13.716 117.595,13.716 117.729,13.582 117.729,8.89 118.872,7.747 RT1.2@118.872,6.223 R11.1@118.872,4.2
USB_CC1: D2.6 U1.24 | length 19
  Top Layer w0.152: U1.24@109.604,27.305 109.95,27.305 110.363,26.892 v1(110.363,26.384) ; v1(124.46,23.387) 125.095,23.387 125.187,23.295 D2.6@125.984,23.295
  Bottom Layer w0.152: v1(110.363,26.384) 110.871,26.384 111.335,25.92 112.439,25.92 112.776,26.257 119.286,26.257 121.434,24.109 124.311,24.109 124.46,23.96 v1(124.46,23.387)
USB_CC2: D2.4 U1.25 | length 18.6
  Top Layer w0.152: U1.25@110.204,27.905 110.204,27.559 110.617,27.146 v1(111.125,27.146) ; v1(124.46,25.103) 125.095,25.103 125.187,25.195 D2.4@125.984,25.195
  Bottom Layer w0.152: v1(111.125,27.146) 111.125,26.638 111.538,26.225 112.236,26.225 112.627,26.616 119.561,26.616 121.709,24.468 124.315,24.468 124.46,24.613 v1(124.46,25.103)
USB_DM_1: CON2_1.2 D6_1.6 | length 5.7
  Top Layer w0.152: D6_1.6@121.793,58.95 121.843,59 CON2_1.2@127.46,59
USB_DM_2: CON2_2.2 D6_2.6 | length 5.6
  Top Layer w0.152: D6_2.6@121.843,80 CON2_2.2@127.46,80
USB_DM_S_1: D6_1.1 IC2_1.11 | length 18.7
  Top Layer w0.152: IC2_1.11@103.785,61.698 115.93,61.698 116.324,61.304 116.324,58.637 116.701,58.26 117.569,58.26 118.259,58.95 D6_1.1@119.253,58.95
USB_DM_S_2: D6_2.1 IC2_2.11 | length 18.7
  Top Layer w0.152: IC2_2.11@103.785,82.698 115.93,82.698 116.324,82.304 116.324,79.637 116.701,79.26 117.569,79.26 118.259,79.95 D6_2.1@119.253,79.95
USB_DN: D1.4 U1.23 | length 21
  Top Layer w0.152: U1.23@109.204,27.305 109.204,26.4 111.125,24.479 v1(111.633,24.479) ; v1(124.46,21.177) 125.095,21.177 125.187,21.269 D1.4@125.984,21.269
  Bottom Layer w0.152: v1(111.633,24.479) 111.633,23.971 112.417,23.187 119.942,23.187 122.587,20.542 124.315,20.542 124.46,20.687 v1(124.46,21.177)
USB_DP: D1.6 U1.22 | length 21.7
  Top Layer w0.152: U1.22@108.804,27.305 108.804,26.292 110.871,24.225 v1(110.871,23.717) ; v1(124.46,19.461) 125.095,19.461 125.187,19.369 D1.6@125.984,19.369
  Bottom Layer w0.152: v1(110.871,23.717) 111.379,23.717 112.252,22.844 119.777,22.844 122.438,20.183 124.311,20.183 124.46,20.034 v1(124.46,19.461)
USB_DP_1: CON2_1.3 D6_1.4 | length 5.7
  Top Layer w0.152: D6_1.4@121.793,57.05 121.843,57 CON2_1.3@127.46,57
USB_DP_2: CON2_2.3 D6_2.4 | length 5.6
  Top Layer w0.152: D6_2.4@121.843,78 CON2_2.3@127.46,78
USB_DP_S_1: D6_1.3 IC2_1.10 | length 18.8
  Top Layer w0.152: IC2_1.10@103.785,61.198 115.69,61.198 115.824,61.064 115.824,58.375 116.459,57.74 117.52,57.74 118.21,57.05 D6_1.3@119.253,57.05
USB_DP_S_2: D6_2.3 IC2_2.10 | length 18.8
  Top Layer w0.152: IC2_2.10@103.785,82.198 115.69,82.198 115.824,82.064 115.824,79.375 116.459,78.74 117.52,78.74 118.21,78.05 D6_2.3@119.253,78.05
VBUS_1: C72_1.2 C73_1.1 CON2_1.1 D6_1.5 IC2_1.12 | length 3.2
  Top Layer w0.381: 120.523,60.153 120.523,58.335 120.858,58 D6_1.5@121.793,58
VBUS_2: C72_2.2 C73_2.1 CON2_2.1 D6_2.5 IC2_2.12 | length 3.2
  Top Layer w0.381: 120.523,81.153 120.523,79.335 120.858,79 D6_2.5@121.793,79
VC0: C40.1 R20.2 U3.8 | length 22.4
  Top Layer w0.152: U3.8@20.025,57.485 20.025,59.268 22.479,61.722 22.479,64.008 20.864,65.623 C40.1@20.864,66.294 21.717,67.147 21.717,70.739 22.225,71.247 R20.2@28.575,71.247
VC1: C37.1 C39.2 R19.2 U3.7 | length 18.4
  Top Layer w0.152: U3.7@20.675,57.485 20.675,59.268 22.987,61.58 22.987,64.389 22.515,64.861 C39.2@22.515,66.294 ; C39.2@22.479,66.294 23.241,67.056 23.495,67.056 C37.1@24.13,67.691 24.13,69.342 24.384,69.596 R19.2@28.575,69.596
VC2: C36.1 C37.2 R17.2 U3.6 | length 15.1
  Top Layer w0.152: U3.6@21.325,57.485 21.325,59.268 23.658,61.601 23.658,64.389 24.13,64.861 C37.2@24.13,66.294 24.892,67.056 25.146,67.056 C36.1@25.781,67.691 27.178,67.691 27.432,67.945 R17.2@28.575,67.945
VC3: C36.2 R14.2 U3.3 U3.4 U3.5 | length 16.9
  Top Layer w0.152: U3.5@21.975,57.485 21.975,58.894 22.136,59.055 22.464,59.055 22.625,58.894 ; U3.4@22.625,57.485 22.625,58.894 ; U3.3@23.275,57.485 23.275,58.894 23.114,59.055 ; R14.2@28.575,66.294 C36.2@25.781,66.294 25.781,65.623 24.13,63.972 24.13,61.423 23.275,60.568 23.275,59.216 23.114,59.055 ; 22.625,58.894 22.786,59.055 23.114,59.055
VDD: C41.2 C42.2 R13.1 U3.1 | length 6.7
  Top Layer w0.381: U3.1@24.575,57.485 C41.2@26.162,57.485 C42.2@28.702,57.485 R13.1@31.242,57.485
VI/O: C9.2 C10.2 C11.2 C12.2 C19.2 C20.2 C21.2 R6.2 T1.1 U1.19 U2.2 U2.3 U2.8 U2.9 | length 24.4
  Top Layer w0.152: U2.9@93.766,18.282 93.774,18.274 93.774,18.048 93.79,18.032 U2.9@94.216,18.032 ; U2.8@94.266,17.632 94.681,17.632 94.815,17.766 94.815,17.898 94.681,18.032 ; U2.9@94.266,18.032 94.681,18.032 ; v1(94.663,19.685) 94.663,18.593 94.815,18.44 94.815,18.166 94.681,18.032 ; v1(106.934,24.479) C9.2@106.934,25.527 106.934,26.035 107.604,26.705 U1.19@107.604,27.305
  Bottom Layer w0.152: v1(94.663,19.685) 97.965,19.685 99.768,17.882 v1(99.768,15.395) ; v1(106.934,15.367) v1(106.934,24.479)
VOUT: C56.2 C57.2 C58.1 C86.1 L4.1 L5.2 L6.1 R31.2
VOUT_1: C25_1.1 C65_1.2 C66_1.2 C67_1.1 L7_1.2 L8_1.1 L9_1.1 R37_1.2
VOUT_2: C25_2.1 C65_2.2 C66_2.2 C67_2.1 L7_2.2 L8_2.1 L9_2.1 R37_2.2
VSENSE: R32.1 R35.2 U5.6 | length 6.3
  Top Layer w0.254: U5.6@81.868,40.099 R32.1@86.503,40.099 R35.2@86.503,41.734
VSENSE3V3: R29.1 R30.2 U4.3 | length 12.4
  Top Layer w0.152: R29.1@43.795,84.836 R30.2@43.795,83.185 53.213,83.185 53.723,83.695 U4.3@54.356,83.695
VSENSE_1: R38_1.1 R41_1.2 U6_1.6 | length 6.3
  Top Layer w0.254: U6_1.6@81.868,61.099 R38_1.1@86.503,61.099 R41_1.2@86.503,62.734
VSENSE_2: R38_2.1 R41_2.2 U6_2.6 | length 6.3
  Top Layer w0.254: U6_2.6@81.868,82.099 R38_2.1@86.503,82.099 R41_2.2@86.503,83.734
VSYS: C22.2 C23.2 C24.2 C47.2 C48.1 C54.2 C55.1 C63_1.2 C63_2.2 C64_1.1 C64_2.1 R27.2 U2.25 U4.5 U5.1 U6_1.1 U6_2.1 | length 6.3
  Top Layer w0.152: R27.2@56.896,80.645 55.76,80.645 55.626,80.779 55.626,84.328 55.943,84.645 U4.5@56.896,84.645
VUSB: C1.2 C2.2 C5.2 C6.2 C7.2 C8.2 C85.2 CON1.A4/B9 CON1.A9/B4 D1.5 D2.5 D3.4 D3.5 D3.6 T1.3 U1.26 U1.27 | length 13.3
  Top Layer w0.381: C2.2@124.46,20.319 D1.5@125.984,20.319 v1(126.842,20.319) ; C1.2@124.46,24.245 D2.5@125.984,24.245 v1(126.842,24.245)
  Bottom Layer w0.381: C85.2@126.842,18.999 v1(126.842,20.319) v1(126.842,24.245) v1(126.842,27.527)
  other v1: 130.835,24.054 130.835,24.816 131.597,24.816 130.835,25.578 131.597,25.578 128.295,26.543 129.057,26.543 128.295,27.305 129.057,27.305
WKUP: R69.2 SW1.1 U8.10 | length 48.4
  Top Layer w0.152: SW1.1@5,14 R69.2@5,18.161 14.859,18.161 16.764,16.256 33.274,16.256 33.655,16.637 33.655,24.25 33.789,24.384 36.315,24.384 36.449,24.518 36.449,27.275 36.583,27.409 U8.10@37.721,27.409
WP: R43.2 R59.2 U9.7 | length 8.2
  Top Layer w0.152: U9.7@41.148,18.288 41.148,17.025 41.282,16.891 R59.2@46.355,16.891 R43.2@48.006,16.891
pads on no net: BH1.0 BH2.0 BH3.0 CON1.A8 CON1.B8 CON1.MH1 CON1.MH2 CON2_1.5 CON2_1.6 CON2_1.7 CON2_1.8 CON2_1.9 CON2_2.5 CON2_2.6 CON2_2.7 CON2_2.8 CON2_2.9 CON3.5 CON3.9 CON3.10 D5.x IC2_1.2 IC2_1.3 IC2_2.2 IC2_2.3 SW1.G1 SW1.G2 U1.2 U1.3 U1.5 U1.6 U1.7 U1.13 U1.18 U1.30 U1.31 U2.6 U2.7 U3.15 U3.21 U8.1 U8.2 U8.3 U8.4 U8.11 U8.13 U8.18 U8.19 U8.20 U8.29 U8.30 U8.31 U8.32

## Polygon pours and split planes (outlines as drawn)
GND on Top Layer "NONET_L-01_P-001" (solid, remove dead copper, pour order 218): 0,3 0,43.815 34.5,43.815 34.5,91 140,91 140,3
VBUS_1 on Top Layer "DIRECT" (solid, pour order 217): 103.385,61.982 104.8,61.982 116.408,61.982 118.39,60 128.397,60 128.397,62.693 127.762,63.328 103.385,63.328
+5VLOC_1 on Top Layer "DIRECT" (solid, pour order 216): 91.059,63.074 91.059,62.185 91.059,59.137 97.536,59.137 97.536,61.55 97.968,61.982 101.085,61.982 101.085,63.074
VBUS_2 on Top Layer "DIRECT" (solid, pour order 201): 103.385,82.982 104.8,82.982 116.408,82.982 118.39,81 128.397,81 128.397,83.693 127.762,84.328 103.385,84.328
VSYS on Top Layer "DIRECT" (solid, pour order 202): 91.566,13.286 91.566,15.332 91.366,15.332 91.366,14.074 91.262,13.97 88.567,13.97 87.805,13.208 69.723,13.208 68.453,14.478 68.453,41.693 76.137,41.693 76.137,42.113 78.308,42.113 78.462,41.959 79.356,41.959 79.356,43.598 68.453,43.598 68.453,62.693 76.137,62.693 76.137,63.119 78.308,63.119 78.468,62.959 79.356,62.959 79.356,64.598 68.453,64.598 68.453,83.693 76.137,83.693 76.137,84.125 78.283,84.125 78.448,83.959 79.356,83.959 79.356,85.598 58.42,85.598 57.848,85.026 56.451,85.026 56.451,84.264 57.848,84.264 58.42,83.693 64.897,83.693 64.897,11.811 66.167,10.541 90.878,10.541 90.878,12.598
NetT1_9 on Top Layer "DIRECT" (solid, pour order 215): 118.999,25.781 118.999,16.891 118.364,16.256 106.934,16.256 106.934,22.606 111.379,22.606 112.903,24.13 115.189,26.416 118.364,26.416
+5V on Top Layer "DIRECt" (solid, pour order 212): 116.078,38.1 116.078,40.386 114.935,41.529 91.186,41.529 91.186,38.1 111.252,38.1 112.808,36.544 112.808,30.893 111.52,29.605 109.855,29.605 109.855,29.005 114.984,29.005 116.078,30.099 116.078,31.242
BAT on Top Layer "DIRECT" (solid, pour order 165): 73.533,19.939 83.693,19.939 83.693,17.447 85.392,15.748 90.866,15.748 90.866,15.132 89.348,15.132 87.678,13.462 73.533,13.462
GND on Top Layer "DIRECT" (solid, pour order 211): 7.62,54.61 7.62,53.34 6.096,53.34 6.096,41.402 3.81,41.402 3.81,54.61
NetD9_1 on Top Layer "DIRECT" (solid, pour order 210): 7.62,56.14 7.62,61.595 8.89,62.865 13.589,62.865 13.843,63.119 13.843,67.056 13.589,67.31 6.55,67.31 5.334,66.094 5.334,56.14
BP_GND on Top Layer "DIRECT" (solid, pour order 208): 9.271,77.343 13.589,77.343 13.843,77.089 13.843,70.739 13.589,70.485 9.271,70.485 9.017,70.739 9.017,77.089
+3V3 on Top Layer "DIRECT" (solid, pour order 207): 38.608,90.551 34.925,90.551 34.925,87.122 38.608,87.122
GND on Top Layer "DIRECT" (solid, pour order 206): 52.07,87.376 52.07,84.582 53.315,84.582 53.772,85.039 54.8,85.039 54.8,84.252 53.873,84.252 53.416,83.795 44.577,83.795 44.577,87.376 46.101,87.376
NetC49_2 on Top Layer "DIRECT" (solid, pour order 205): 54.102,90.678 54.102,87.63 45.288,87.63 44.399,88.519 41.529,88.519 39.243,88.519 39.243,90.678
NetC46_1 on Top Layer "DIRECT" (solid, pour order 204): 52.324,86.106 54.737,86.106 55.499,85.344 57.531,85.344 57.531,90.678 55.372,90.678 55.372,87.63 54.737,86.995 52.324,86.995
GND on Top Layer "DIRECt" (solid, pour order 181): 82.931,28.993 86.36,28.993 88.265,30.898 96.012,30.898 96.012,27.469 82.931,27.469
NetC62_1_1 on Top Layer "DIRECT" (solid, pour order 168): 79.356,62.79 79.356,62.409 78.38,62.409 78.207,62.236 76.302,62.236 76.302,62.409 76.302,62.79 76.302,62.947 78.227,62.947 78.384,62.79
VOUT_1 on Top Layer "DIRECT" (solid, pour order 170): 82.931,56.597 84.836,58.502 96.012,58.502 96.012,52.152 88.138,52.152 86.233,50.247 82.931,50.247
NetC62_1_1 on Top Layer "DIRECT" (solid, pour order 174): 75.819,60.28 78.486,60.28 78.486,52.152 76.581,50.247 74.041,50.247 74.041,58.502
GND on Top Layer "DIRECT" (solid, pour order 178): 68.783,48.469 78.486,48.469 78.486,51.771 76.708,49.993 73.787,49.993 73.787,58.652 75.669,60.534 78.74,60.534 78.74,59.518 82.931,59.518 82.931,56.978 84.709,58.756 87.249,58.756 87.249,60.407 85.852,60.407 85.852,60.788 81.206,60.788 81.206,64.471 79.606,64.471 79.606,62.239 78.445,62.239 78.263,62.058 76.137,62.058 76.137,62.439 68.783,62.439
GND on Top Layer "DIRECt" (solid, pour order 172): 82.931,49.993 86.36,49.993 88.265,51.898 96.012,51.898 96.012,48.469 82.931,48.469
+5VLOC_2 on Top Layer "DIRECT" (solid, pour order 200): 91.059,84.328 91.059,83.185 91.059,80.137 97.536,80.137 97.536,82.55 97.968,82.982 101.085,82.982 101.085,84.328
GND on Top Layer "DIRECt" (solid, pour order 171): 82.931,70.993 86.36,70.993 88.265,72.898 96.012,72.898 96.012,69.469 82.931,69.469
GND on Top Layer "DIRECT" (solid, pour order 199): 126.365,28.981 129.413,28.981 129.413,32.385 126.365,32.385
VUSB on Top Layer "DIRECT" (solid, pour order 196): 126.554,26.1 129.958,26.1 130.435,25.623 130.435,24.638 130.435,23.571 130.988,23.571 132.055,24.638 132.055,25.623 132.055,26.187 131.547,26.695 131.267,26.975 129.437,28.805 125.011,28.805 109.855,28.805 109.855,28.205 111.209,28.205 112.597,26.817 119.868,26.817 120.777,25.908 120.777,22.606 119.516,22.606 119.516,21.209 122.174,21.209 122.174,25.968 123.023,26.817 125.837,26.817
SW2 on Top Layer "DIRECT" (solid, pour order 189): 91.615,8.636 91.615,5.08 91.234,4.699 86.301,4.699 85.9,5.1 85.9,8.636 86.281,9.017 91.234,9.017
SW2 on Top Layer "DIRECt" (solid, pour order 184): 92.016,14.132 92.016,17.077 91.516,17.577 91.059,17.577 91.059,15.669 91.234,15.494 91.615,15.494 91.816,15.293 91.816,14.132
SW1 on Top Layer "DIRECT" (solid, pour order 193): 93.117,8.636 93.117,5.08 93.498,4.699 98.431,4.699 98.832,5.1 98.832,8.636 98.451,9.017 93.498,9.017
PMID on Top Layer "DIRECT" (solid, pour order 188): 93.876,12.598 93.166,13.308 93.166,15.332 93.366,15.332 93.366,14.076 93.497,13.945 96.212,13.945 96.949,13.208 105.966,13.208 105.966,10.541 93.876,10.541
GND on Top Layer "DIRECT" (solid, pour order 186): 91.056,10.541 93.698,10.541 93.698,12.522 92.91,13.31 92.91,13.98 92.493,13.98 92.493,17.08 93.167,17.755 93.368,17.755 93.466,17.853 93.466,18.945 93.901,19.38 93.901,20.066 92.405,20.066 92.405,19.403 92.866,18.942 92.866,17.834 92.812,17.78 91.742,17.78 91.742,17.58 92.239,17.083 92.239,13.98 91.818,13.98 91.818,13.284 91.056,12.522
SW1 on Top Layer "DIRECt" (solid, pour order 187): 92.716,14.132 92.716,17.075 93.218,17.577 93.701,17.577 93.701,15.697 93.498,15.494 93.117,15.494 92.916,15.293 92.916,14.132
VI/O on Top Layer "DIRECT" (solid, pour order 164): 119.516,16.646 118.618,15.748 93.866,15.748 93.866,15.132 95.358,15.132 97.028,13.462 129.54,13.462 129.54,15.748 123.063,15.748 122.174,16.637 122.174,20.066 119.516,20.066
VOUT on Top Layer "DIRECT" (solid, pour order 180): 82.931,35.597 84.836,37.502 96.012,37.502 96.012,31.152 88.138,31.152 86.233,29.247 82.931,29.247
NetC53_1 on Top Layer "DIRECT" (solid, pour order 179): 79.356,41.79 79.356,41.409 78.38,41.409 78.207,41.236 76.302,41.236 76.302,41.409 76.302,41.79 76.302,41.947 78.227,41.947 78.384,41.79
NetC53_1 on Top Layer "DIRECT" (solid, pour order 182): 75.819,39.28 78.486,39.28 78.486,31.152 76.581,29.247 74.041,29.247 74.041,37.502
GND on Top Layer "DIRECT" (solid, pour order 183): 68.783,27.469 78.486,27.469 78.486,30.771 76.708,28.993 73.787,28.993 73.787,37.652 75.669,39.534 78.74,39.534 78.74,38.518 82.931,38.518 82.931,35.978 84.709,37.756 87.249,37.756 87.249,39.407 85.852,39.407 85.852,39.788 81.206,39.788 81.206,43.471 79.606,43.471 79.606,41.239 78.45,41.239 78.269,41.058 76.137,41.058 76.137,41.439 68.783,41.439
GND on Top Layer "DIRECT" (solid, pour order 177): 68.783,69.469 78.486,69.469 78.486,72.771 76.708,70.993 73.787,70.993 73.787,79.652 75.669,81.534 78.74,81.534 78.74,80.518 82.931,80.518 82.931,77.978 84.709,79.756 87.249,79.756 87.249,81.407 85.852,81.407 85.852,81.788 81.206,81.788 81.206,85.471 79.606,85.471 79.606,83.239 78.464,83.239 78.283,83.058 76.137,83.058 76.137,83.439 68.783,83.439
NetC62_2_1 on Top Layer "DIRECT" (solid, pour order 173): 75.819,81.28 78.486,81.28 78.486,73.152 76.581,71.247 74.041,71.247 74.041,79.502
VOUT_2 on Top Layer "DIRECT" (solid, pour order 169): 82.931,77.597 84.836,79.502 96.012,79.502 96.012,73.152 88.138,73.152 86.233,71.247 82.931,71.247
NetC62_2_1 on Top Layer "DIRECT" (solid, pour order 167): 79.356,83.79 79.356,83.409 78.38,83.409 78.207,83.236 76.302,83.236 76.302,83.409 76.302,83.79 76.302,83.947 78.227,83.947 78.384,83.79
GND on Mid Layer 1 "NONET_L-01_P-001" (solid, pour order 213): 0,3 0,43.815 34.5,43.815 34.5,91 140,91 140,3
BP_GND on Mid Layer 1 "NONET_L-01_P-001" (solid, pour order 203): 0,91 34,91 34,44.323 0,44.323
GND on Bottom Layer "NONET_L-01_P-001" (solid, pour order 219): 0,0 0,43.815 34.5,43.815 34.5,94 140,94 140,0
VUSB on Bottom Layer "DIRECT" (solid, pour order 214): 132.526,26.1 134.132,26.1 134.132,26.7 132.553,26.7 131.542,26.7 129.44,28.802 125.857,28.802 125.857,26.797 126.554,26.1 129.932,26.1 130.429,25.603 130.429,21.59 130.719,21.3 132.561,21.3 134.132,21.3 134.132,21.9 132.405,21.9 132.042,22.263 132.042,25.616
GND on Bottom Layer "DIRECT" (solid, pour order 198): 131.571,21.1 129.642,19.171 132.055,19.171 133.325,20.441 134.163,20.441 134.163,21.1
GND on Bottom Layer "DIRECT" (solid, pour order 197): 131.571,26.9 129.642,28.829 132.055,28.829 133.325,27.559 134.163,27.559 134.163,26.9
BP_GND on Bottom Layer "DIRECT" (solid, pour order 209): 13.85,74.636 13.85,88.8 8.85,88.8 8.85,74.763 9.191,74.422 13.636,74.422
NetC62_1_1 on Bottom Layer "NONET_L-01_P-001" (solid, pour order 176): 77.648,63.963 77.191,63.963 76.81,63.582 76.073,63.582 76.073,58.756 78.765,58.756 78.765,63.582 78.029,63.582
BAT on Bottom Layer "NONET_L-01_P-001" (solid, pour order 194): 76.073,16.764 76.073,16.383 76.073,15.367 76.073,13.97 76.327,13.716 76.708,13.716 77.47,12.954 79.756,12.954 80.391,13.589 80.772,13.589 81.026,13.843 81.026,15.494 81.026,16.256 81.026,16.764 80.772,17.018 76.327,17.018
SW2 on Bottom Layer "NONET_L-01_P-001" (solid, pour order 190): 87.043,18.796 90.472,18.796 92.25,17.018 92.25,14.859 91.107,13.716 89.481,13.716 88.77,13.005 88.77,4.699 85.9,4.699 85.9,17.653
SW1 on Bottom Layer "NONET_L-01_P-001" (solid, pour order 192): 97.689,18.796 94.26,18.796 92.482,17.018 92.482,14.859 93.625,13.716 95.251,13.716 95.962,13.005 95.962,4.699 98.832,4.699 98.832,17.653
GND on Bottom Layer "NONET_L-01_P-001" (solid, pour order 191): 91.869,14.224 91.183,13.538 89.532,13.538 88.948,12.954 88.948,3.81 89.685,3.81 89.685,12.954 90.853,12.954 95.044,12.954 95.044,12.319 95.044,3.81 95.806,3.81 95.806,12.827 95.095,13.538 93.571,13.538 92.885,14.224
NetC53_1 on Bottom Layer "NONET_L-01_P-001" (solid, pour order 185): 77.648,42.963 77.191,42.963 76.81,42.582 76.073,42.582 76.073,37.756 78.765,37.756 78.765,42.582 78.029,42.582
NetC62_2_1 on Bottom Layer "NONET_L-01_P-001" (solid, pour order 175): 77.648,84.963 77.191,84.963 76.81,84.582 76.073,84.582 76.073,79.756 78.765,79.756 78.765,84.582 78.029,84.582
+3V3 on Mid Layer 2 "NONET_L-01_P-001" (solid, pour order 166): 0,3 0,43.815 34.5,43.815 34.5,91 140,91 140,3

## Keep-outs
Keep-Out Layer:
  the board outline again, w0.254

## Other copper
Top Layer:
  pour cut-out: 54.102,90.83 54.102,87.63 55.372,87.63 55.372,90.83
  pour cut-out: 68.961,83.68 68.961,83.452 75.616,83.452 75.616,83.68
  pour cut-out: 68.961,62.674 68.961,62.446 75.616,62.446 75.616,62.674
  pour cut-out: 69.088,41.681 69.088,41.453 75.59,41.453 75.59,41.681
  pour cut-out: 91.996,19.401 91.974,18.05 92.866,18.05 92.866,18.942 92.407,19.401
  pour cut-out: 105.258,30.607 105.258,28.524 106.705,28.524 106.705,30.607
  pour cut-out: 119.516,21.209 119.516,20.066 122.326,20.066 122.326,21.209
  pour cut-out: 91.742,10.287 91.742,3.429 93.012,3.429 93.012,10.287
  pour cut-out: 78.74,38.264 78.74,27.469 82.677,27.469 82.677,38.264
  pour cut-out: 78.74,59.264 78.74,48.469 82.677,48.469 82.677,59.264
  pour cut-out: 78.74,80.264 78.74,69.469 82.677,69.469 82.677,80.264
  text "OpenPack" at 130.285,7.947 h0.76
  text "BATMOD_V2p0" at 130.285,6.169 h0.76
  text "FP / 26" at 130.275,4.437 h0.76

## Silkscreen, mask and mechanical layers (free items; w line width, h text height)
Top Overlay:
  circle w0.254: c102,20.15 r3
  circle w0.254: c61.5,73.85 r3
  circle w0.254: c21,73.85 r3
  circle w0.254: c61.5,20.15 r3
  circle w0.254: c102,73.85 r3
  circle w0.254: c21,20.15 r3
  text "BATMOD" at 2.413,83.82 h5.08
  text "USB2" at 135.305,81.793 h1.52 r270
  text "V2p0" at 1.778,79.671 h2.03
  text "USB1" at 135.305,60.793 h1.52 r270
  text "SWD" at 31.547,41.199 h1.52
  text "STAY" at 47.957,36.373 h1.52
  text "STAT" at 128.448,33.988 h1.52
  text "SDA" at 49.073,23.966 h1.52
  text "SCL" at 49.073,21.426 h1.52
  text "GND" at 49.073,18.886 h1.52
  text "GND" at 49.073,16.346 h1.52
  text "WP" at 47.117,13.005 h1.52 r90
Top Solder:
  text "OpenPack" at 130.285,7.947 h0.76
  text "BATMOD_V2p0" at 130.285,6.169 h0.76
  text "FP / 26" at 130.275,4.437 h0.76